# EAGLE board backpack_board (EAGLE 6.4)
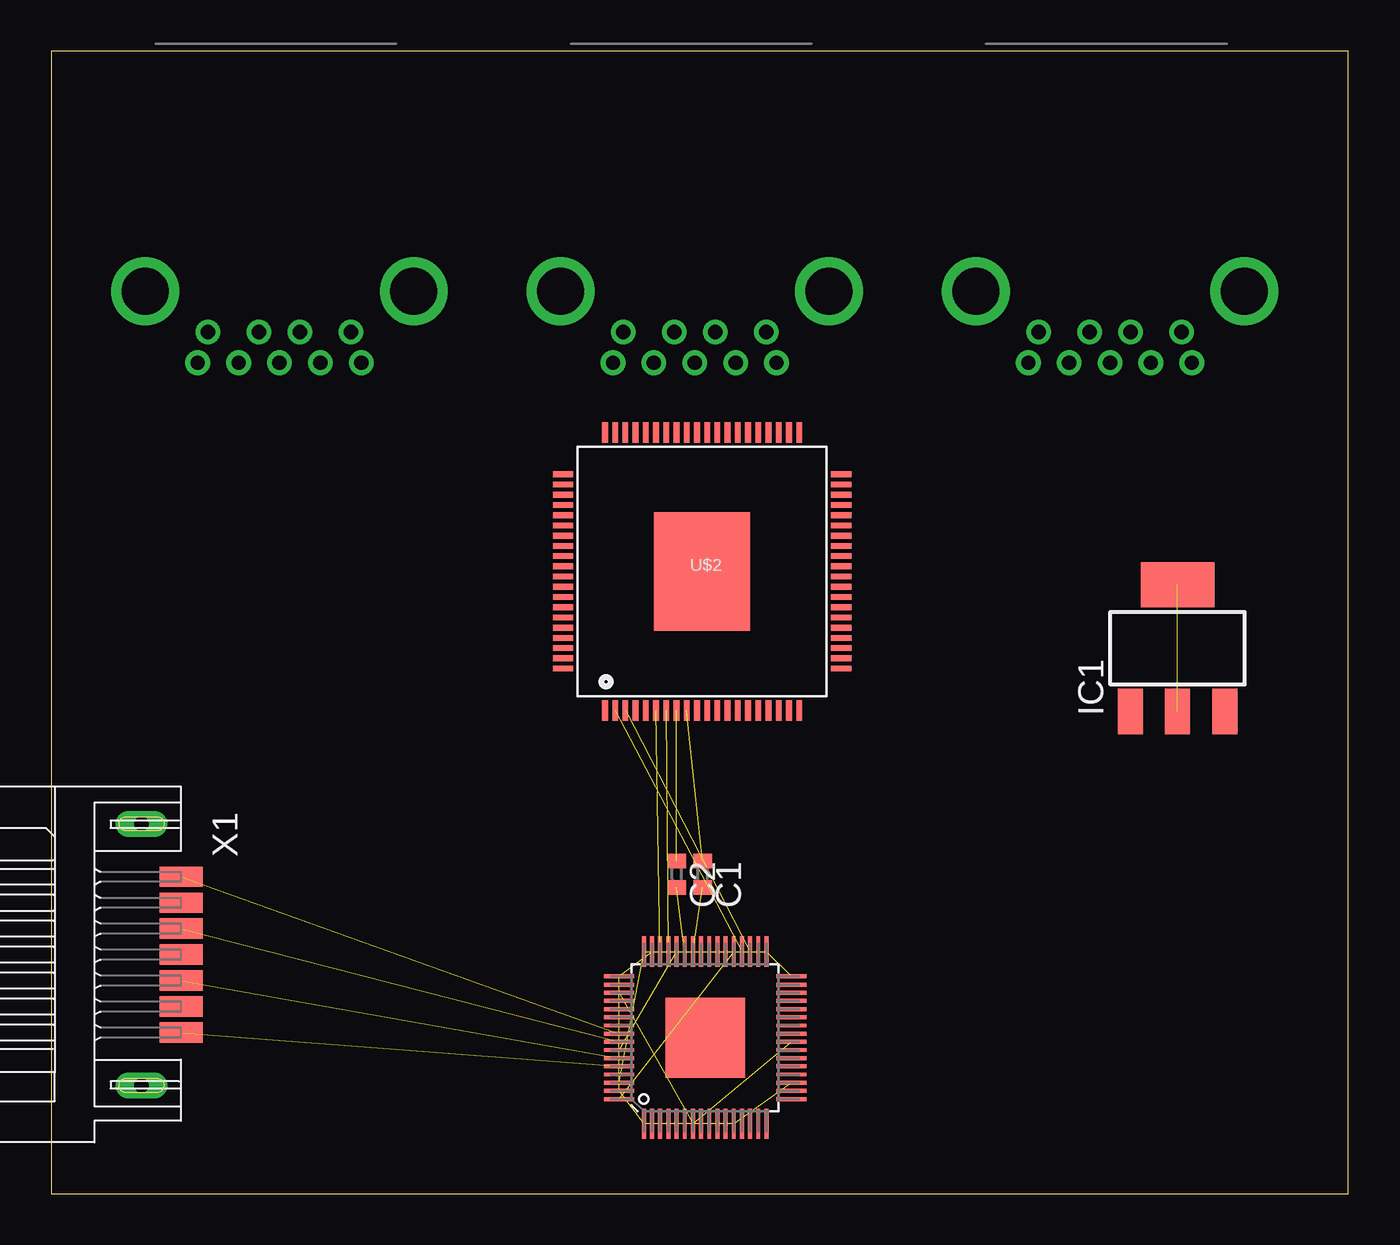
[diagram p0: board, top side]
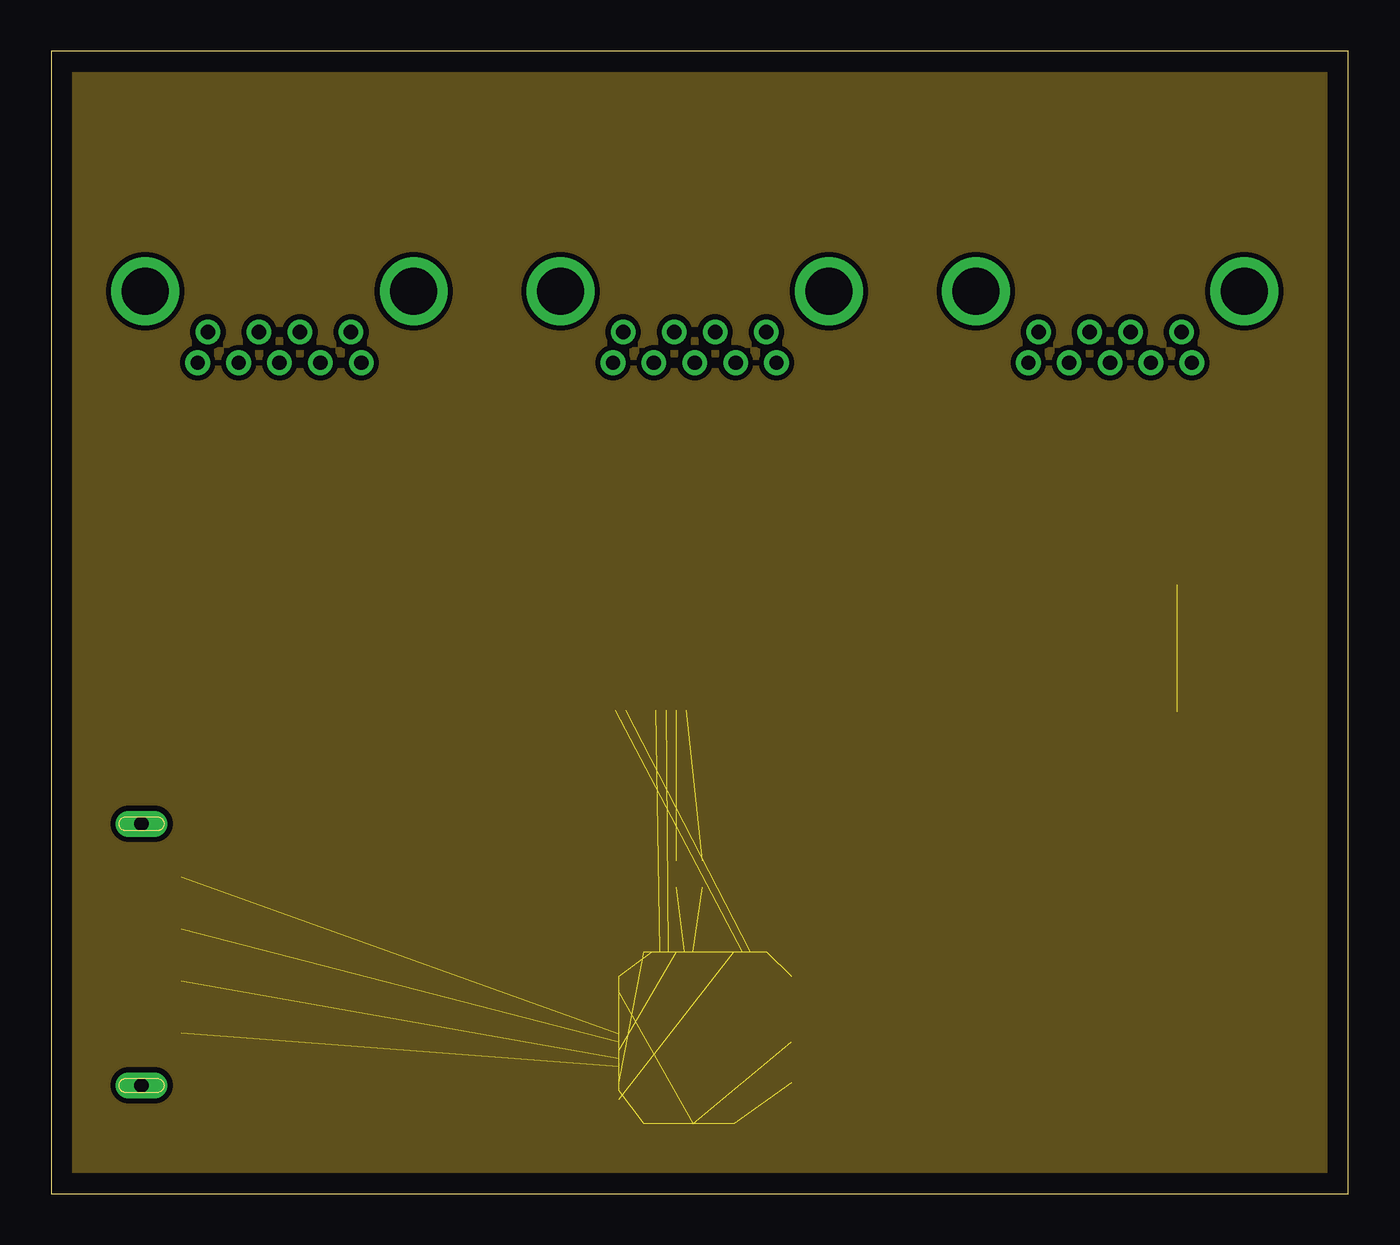
[diagram p1: board, inner layer Route2]
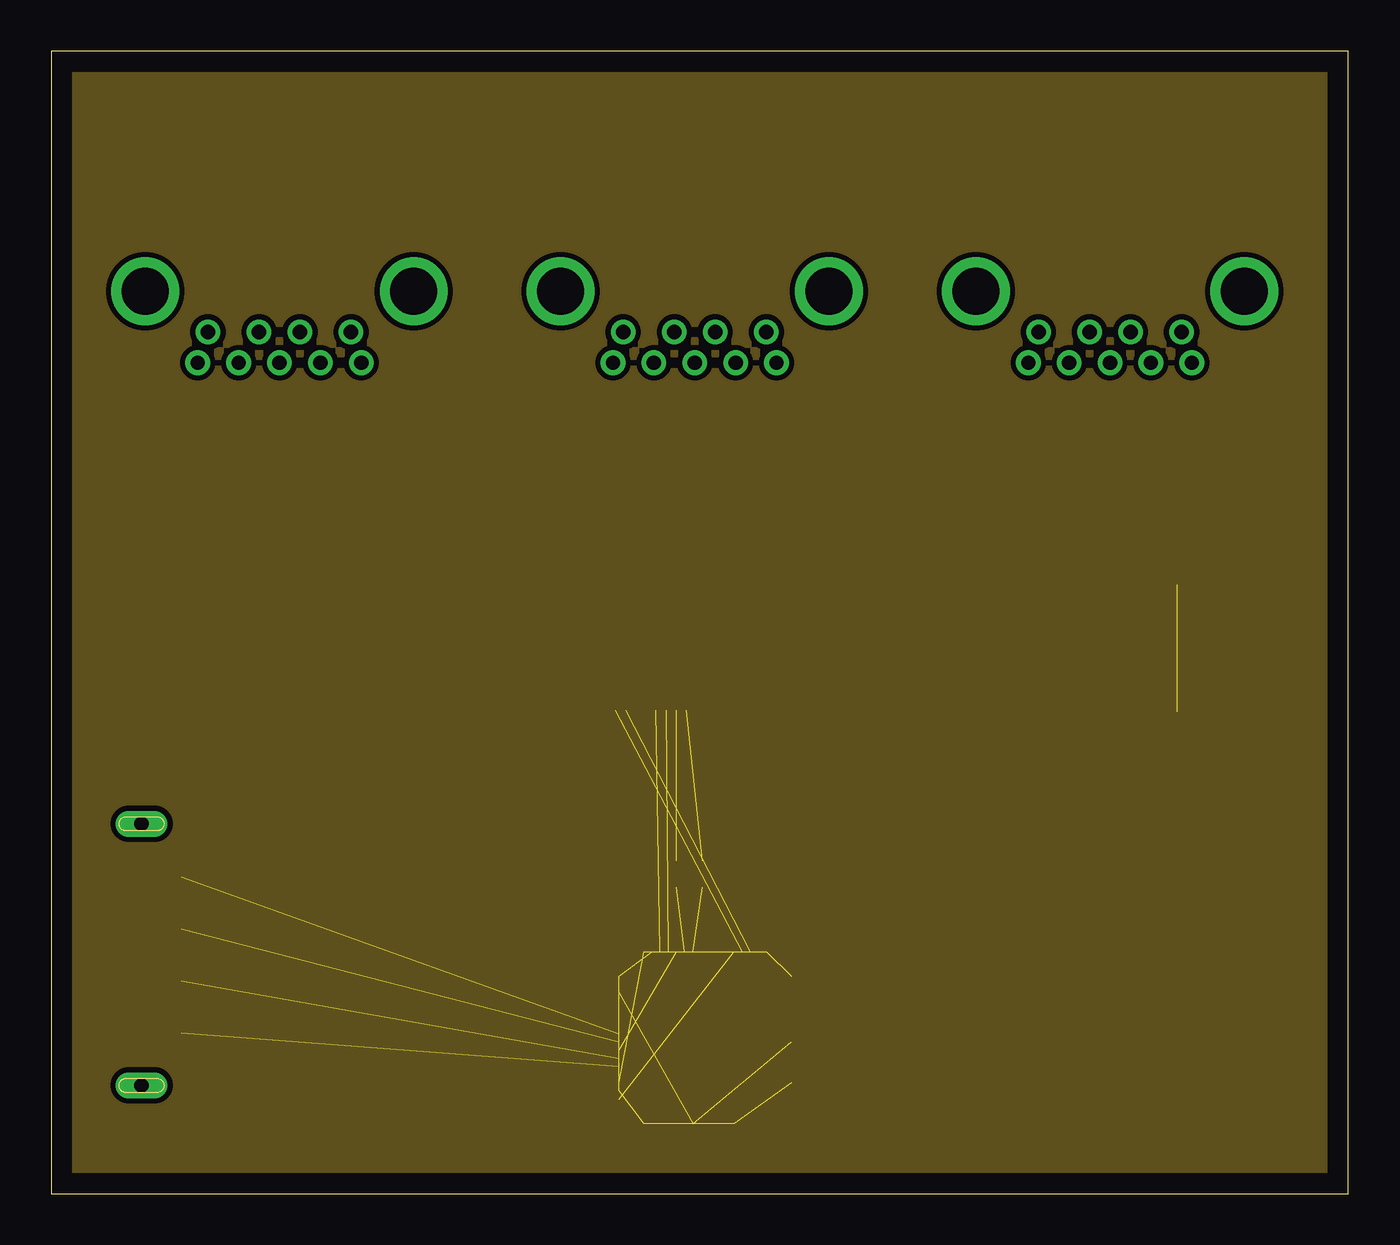
[diagram p2: board, inner layer Route3]

Size 63.48 x 55.88 mm. Coordinates in mm from the lower left corner, seen from the top.
Outline: 0,0 63.48,0 63.48,55.88 0,55.88 0,0
Copper layers (1*2*3*16): Top 0.035mm / dielectric 1.5mm / Route2 0.035mm / dielectric 0.15mm / Route3 0.035mm / dielectric 0.2mm / Bottom 0.035mm
Design rules "default *": minimum track width 10mil, minimum drill 24mil, track to track 10mil, track to pad 8mil, pad to pad 8mil, via to via 8mil, smd to smd 8mil, copper to edge 40mil, drill to drill 8mil, minimum pad ring 10mil, minimum via ring 8mil, stop-mask expansion 4mil, vias tented up to drill 0mil, thermal gap 10mil

## Footprints (pad centres in the part's own frame; a part is rotated, then mirrored left to right if it is on the bottom)
C0402 = smd 0.7 x 0.9: 1 -0.65,0; 2 0.65,0
SOT223 = smd 1.219 x 2.235: 1 -2.311,-3.099; 2 0,-3.099; 3 2.311,-3.099 | smd 3.6 x 2.2: 4 0,3.099
S-PQFP-G64 = smd 1.473 x 0.19: FREQSEL_BIT_0 4.216,2.2; FREQSEL_BIT_1 4.216,2.6; JTAG_TCK 4.216,0.2; JTAG_TDI 4.216,0.6; JTAG_TDO 4.216,1; JTAG_TMS 4.216,1.4; JTAG_TRSTZ 4.216,1.8; NC@1 -4.216,-3; SATA_RXM -4.216,-1; SATA_RXP -4.216,-1.4; SATA_TXM -4.216,0.2; SATA_TXP -4.216,-0.2; SPI_CS0 4.216,-1.4; SPI_CS1_GPIO10 4.216,-1; SPI_CS2_GPIO11 4.216,-0.6; SPI_DATA_IN 4.216,-1.8; SPI_DATA_OUT 4.216,-2.6; SPI_SCLK 4.216,-3; USB_VBUS -4.216,2.6; VDD33@1 4.216,-0.2; VDD33@2 -4.216,2.2; VDD@2 4.216,-2.2; VDD@3 4.216,3; VDD@7 -4.216,3; VDD@8 -4.216,0.6; VDD@9 -4.216,-1.8; VDD@10 -4.216,-2.6; VDDA@3 -4.216,-2.2; VSS@1 -4.216,-0.6; VSSOSC -4.216,1.4; XI -4.216,1.8; XO -4.216,1 | smd 0.19 x 1.473: GPIO0 -0.2,-4.216; GPIO1 0.2,-4.216; GPIO2 0.6,-4.216; GPIO3 1,-4.216; GPIO4 1.8,-4.216; GPIO5 2.2,-4.216; GPIO6 2.6,-4.216; GPIO7 3,-4.216; GPIO8_UART_RX -1.4,-4.216; GPIO9_UART_TX -1,-4.216; GRSTZ -1.8,-4.216; NC 1.4,4.216; PWM0 -2.6,-4.216; PWM1 -2.2,-4.216; USB_DM 2.2,4.216; USB_DP 1.8,4.216; USB_R1 1,4.216; USB_R1RTN 0.6,4.216; USB_SSRXM -1.8,4.216; USB_SSRXP -2.2,4.216; USB_SSTXM -0.6,4.216; USB_SSTXP -1,4.216; VDD -3,-4.216; VDD33 -0.6,-4.216; VDD@1 1.4,-4.216; VDD@4 3,4.216; VDD@5 -0.2,4.216; VDD@6 -2.6,4.216; VDDA33 2.6,4.216; VDDA33@1 0.2,4.216; VDDA33@2 -3,4.216; VSS -1.4,4.216 | smd 3.9 x 3.9: TP 0,0
S-PQFP-G80 = smd 0.28 x 1: 1 -4.75,-6.8; 2 -4.25,-6.8; 3 -3.75,-6.8; 4 -3.25,-6.8; 5 -2.75,-6.8; 6 -2.25,-6.8; 7 -1.75,-6.8; 8 -1.25,-6.8; 9 -0.75,-6.8; 10 -0.25,-6.8; 11 0.25,-6.8; 12 0.75,-6.8; 13 1.25,-6.8; 14 1.75,-6.8; 15 2.25,-6.8; 16 2.75,-6.8; 17 3.25,-6.8; 18 3.75,-6.8; 19 4.25,-6.8; 20 4.75,-6.8; 41 4.75,6.8; 42 4.25,6.8; 43 3.75,6.8; 44 3.25,6.8; 45 2.75,6.8; 46 2.25,6.8; 47 1.75,6.8; 48 1.25,6.8; 49 0.75,6.8; 50 0.25,6.8; 51 -0.25,6.8; 52 -0.75,6.8; 53 -1.25,6.8; 54 -1.75,6.8; 55 -2.25,6.8; 56 -2.75,6.8; 57 -3.25,6.8; 58 -3.75,6.8; 59 -4.25,6.8; 60 -4.75,6.8 | smd 1 x 0.28: 21 6.8,-4.75; 22 6.8,-4.25; 23 6.8,-3.75; 24 6.8,-3.25; 25 6.8,-2.75; 26 6.8,-2.25; 27 6.8,-1.75; 28 6.8,-1.25; 29 6.8,-0.75; 30 6.8,-0.25; 31 6.8,0.25; 32 6.8,0.75; 33 6.8,1.25; 34 6.8,1.75; 35 6.8,2.25; 36 6.8,2.75; 37 6.8,3.25; 38 6.8,3.75; 39 6.8,4.25; 40 6.8,4.75; 61 -6.8,4.75; 62 -6.8,4.25; 63 -6.8,3.75; 64 -6.8,3.25; 65 -6.8,2.75; 66 -6.8,2.25; 67 -6.8,1.75; 68 -6.8,1.25; 69 -6.8,0.75; 70 -6.8,0.25; 71 -6.8,-0.25; 72 -6.8,-0.75; 73 -6.8,-1.25; 74 -6.8,-1.75; 75 -6.8,-2.25; 76 -6.8,-2.75; 77 -6.8,-3.25; 78 -6.8,-3.75; 79 -6.8,-4.25; 80 -6.8,-4.75 | smd 4.7 x 5.8: 81 0,0
R_A_DIP = drill 0.7: 1 -1.5,3.5; 2 -1.5,1; 3 -1.5,-1; 4 -1.5,-3.5; 5 0,-4; 6 0,-2; 7 0,0; 8 0,2; 9 0,4 | drill 2.3: SHIELD -3.5,6.57; SHIELD@1 -3.5,-6.57
CCATA_32009_10X = smd 1 x 2.1: 1 -3.81,11.2; 2 -2.54,11.2; 3 -1.27,11.2; 4 0,11.2; 5 1.27,11.2; 6 2.54,11.2; 7 3.81,11.2 | drill 0.7 pad 1.27 long: M1 -6.4,9.25; M2 6.4,9.25

## Placement (x,y rotation side)
C1  [C0402]  31.88,15.62 270 top
C2  [C0402]  30.61,15.62 270 top
IC1  LT1963EST-3.3  [SOT223]  55.12,26.67 0 top
U$1  TUSB9261PVP  [S-PQFP-G64]  32,7.62 0 top
U$2  TUSB8040PFP  [S-PQFP-G80]  31.85,30.43 0 top
U$3  USB_SS_CONN_TYPE_A  [R_A_DIP]  51.82,40.64 270 top
U$4  USB_SS_CONN_TYPE_A  [R_A_DIP]  31.5,40.64 270 top
U$5  USB_SS_CONN_TYPE_A  [R_A_DIP]  11.18,40.64 270 top
X1  SATA7-32009-10X  [CCATA_32009_10X]  -4.83,11.68 270 top

## Library data of the parts
C1 C2 = rcl
IC1 = linear-technology; MPN: LT1963EST-3.3; OC_FARNELL: 1501032; OC_NEWARK: 57M7546
U$1 = tusb9261pvp
U$2 = tusb8040a1
U$3-U$5 = usb3_type_a
X1 = con-cypressindustries; OC_FARNELL: unknown; OC_NEWARK: unknown

## Nets
1_N: C1.1 U$2.9
1_P: C2.1 U$2.8
2_N: U$1.USB_SSRXM U$2.7
2_P: U$1.USB_SSRXP U$2.6
3_N: U$1.USB_DM U$2.3
3_P: U$1.USB_DP U$2.2
7: U$1.USB_VBUS
8: U$1.USB_R1
9: U$1.USB_R1RTN
GND: IC1.2 IC1.4
N$1: U$3.1
N$2: U$3.2
N$3: U$3.3
N$4: U$3.4
N$5: U$3.5
N$6: U$3.6
N$7: U$3.7
N$8: U$3.8
N$9: U$3.9
N$10: U$4.1
N$11: U$4.2
N$12: U$4.3
N$13: U$4.4
N$14: U$4.5
N$15: U$4.6
N$16: U$4.7
N$17: U$4.8
N$18: U$4.9
N$19: U$5.1
N$20: U$5.2
N$21: U$5.3
N$22: U$5.4
N$23: U$5.5
N$24: U$5.6
N$25: U$5.7
N$26: U$5.8
N$27: U$5.9
N$28: U$2.12
N$29: U$2.13
N$30: U$2.14
N$31: U$2.15
N$32: U$2.16
N$33: U$2.17
N$34: U$2.18
N$35: U$2.60
N$36: U$2.59
N$37: U$2.58
N$38: U$2.57
N$39: U$2.56
N$40: U$2.55
N$41: U$2.54
N$42: U$2.53
N$43: U$2.52
N$44: U$2.51
N$45: U$2.50
N$46: U$2.49
N$47: U$2.48
N$48: U$2.47
N$49: U$2.46
N$50: U$2.45
N$51: U$2.44
N$52: U$2.43
N$53: U$2.42
N$54: U$2.41
N$55: U$2.70
N$56: U$2.25
N$57: U$2.80
N$58: U$2.79
N$59: U$2.78
N$60: U$2.77
N$61: U$2.76
N$62: U$2.75
N$63: U$2.74
N$64: U$2.73
N$65: U$2.72
N$66: U$2.71
N$67: U$2.69
N$68: U$2.68
N$69: U$2.67
N$70: U$2.66
N$71: U$2.65
N$72: U$2.64
N$73: U$2.63
N$74: U$2.62
N$75: U$2.61
N$76: U$2.1
N$77: U$2.4
N$78: U$2.5
N$79: U$2.10
N$80: U$2.11
N$81: U$2.21
N$82: U$2.22
N$83: U$2.23
N$84: U$2.24
N$85: U$2.26
N$86: U$2.27
N$87: U$2.28
N$88: U$2.29
N$89: U$2.30
N$90: U$2.31
N$91: U$2.32
N$92: U$2.33
N$93: U$2.34
N$94: U$2.35
N$95: U$2.36
N$96: U$2.37
N$97: U$2.38
N$98: U$2.39
N$99: U$2.40
N$100: U$2.81
N$101: U$1.SATA_TXP X1.3
N$102: U$1.SATA_TXM X1.1
N$103: U$1.SATA_RXP X1.7
N$104: U$1.SATA_RXM X1.5
NC: U$1.NC U$1.NC@1
SATA_SSTXP_N: C1.2 U$1.USB_SSTXM
SATA_SSTXP_P: C2.2 U$1.USB_SSTXP
TP: U$1.TP
VDD: U$1.VDD U$1.VDD@1 U$1.VDD@2 U$1.VDD@3 U$1.VDD@4 U$1.VDD@5 U$1.VDD@6 U$1.VDD@7 U$1.VDD@8 U$1.VDD@9 U$1.VDD@10
VDD33: U$1.VDD33 U$1.VDD33@1 U$1.VDD33@2
VDDA33: U$1.VDDA33 U$1.VDDA33@1 U$1.VDDA33@2 U$1.VDDA@3
VSS: U$1.VSS U$1.VSS@1
VSSOSC: U$1.VSSOSC

## Tracks (layer width: path | path; a pad name or v marks a point on that pad's centre or on a via)
1_N  (1 unrouted)
1_P  (1 unrouted)
2_N  (1 unrouted)
2_P  (1 unrouted)
3_N  (1 unrouted)
3_P  (1 unrouted)
GND  (1 unrouted)
  pour Route2 (rank 6): 0.51,55.37 62.99,55.37 62.99,0.51 0.51,0.51
N$101  (1 unrouted)
N$102  (1 unrouted)
N$103  (1 unrouted)
N$104  (1 unrouted)
NC  (1 unrouted)
SATA_SSTXP_N  (1 unrouted)
SATA_SSTXP_P  (1 unrouted)
VDD  (10 unrouted)
  pour Route3 (rank 6): 0.51,55.37 62.99,55.37 62.99,0.51 0.51,0.51
VDD33  (2 unrouted)
VDDA33  (3 unrouted)
VSS  (1 unrouted)